# EAGLE board RAMPSdisplay (EAGLE 6.2)
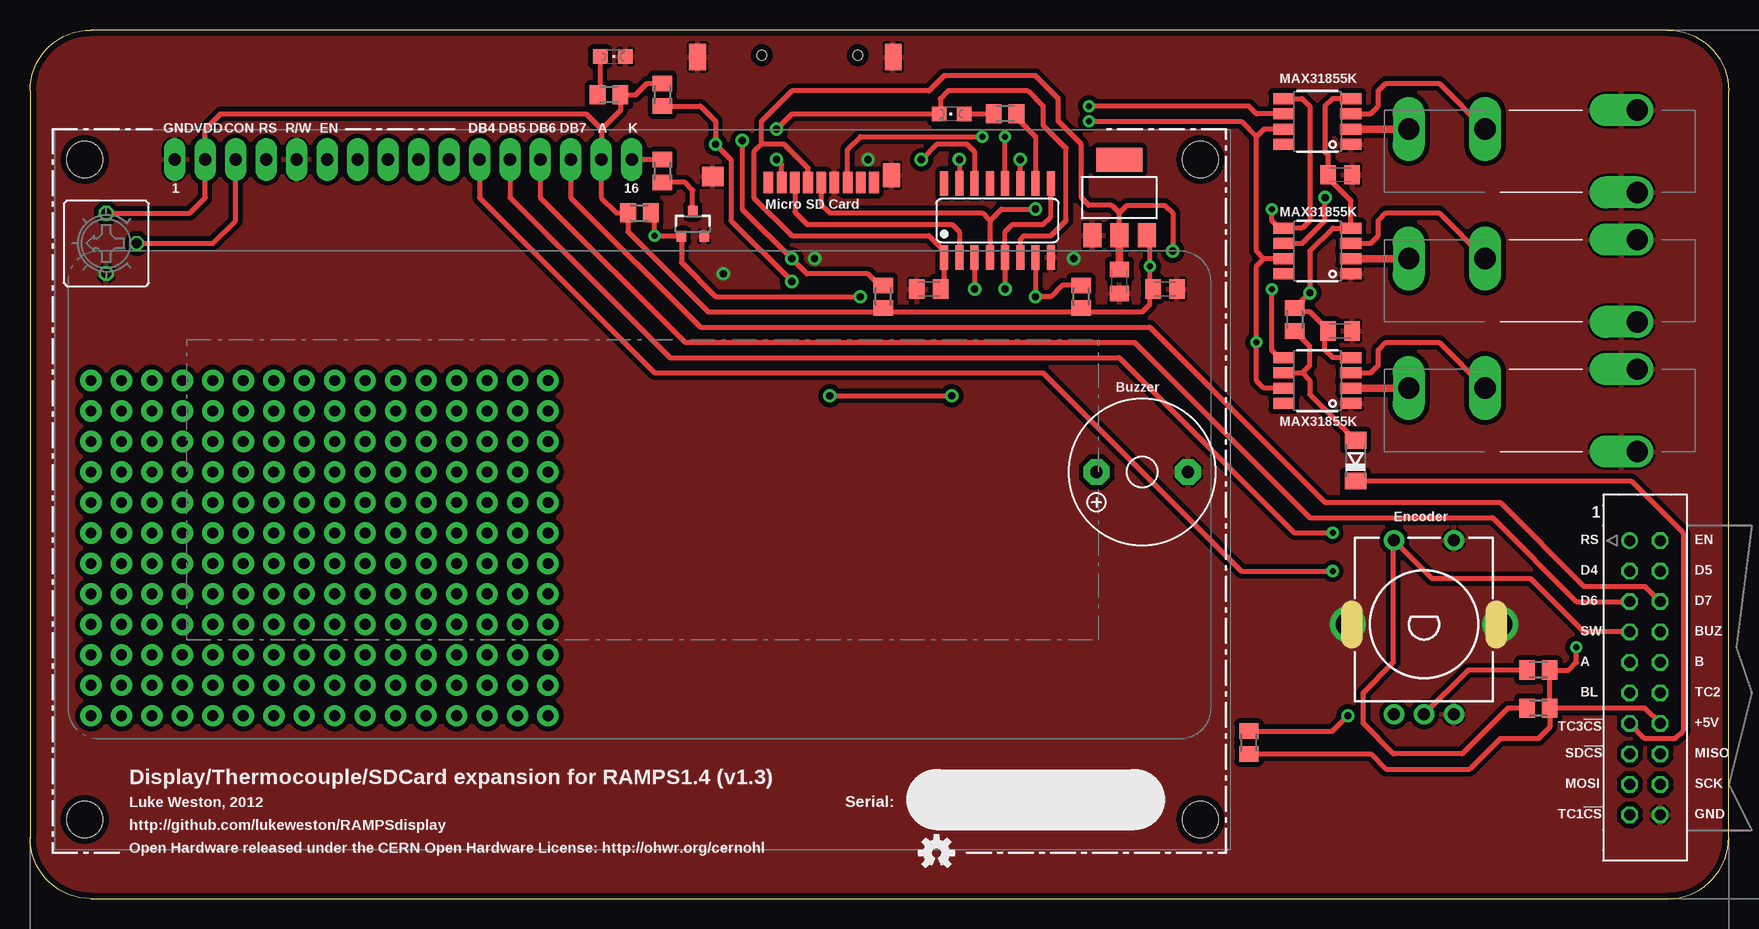
[diagram p0: board, top side]
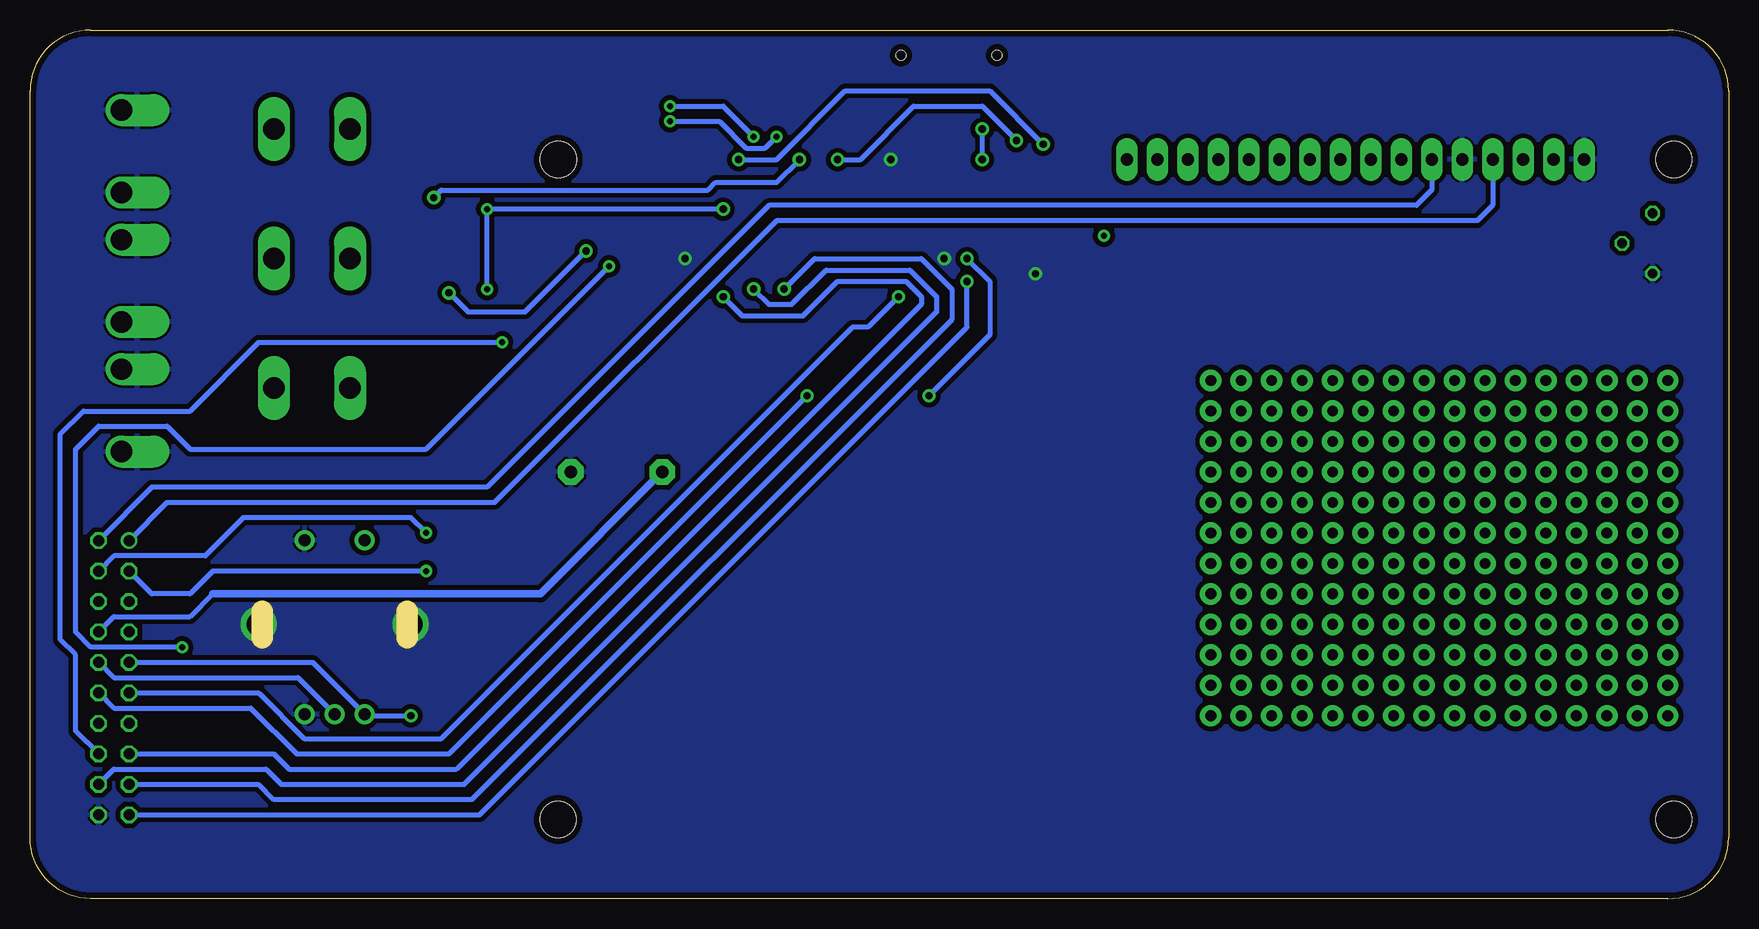
[diagram p1: board, bottom side, seen from below]

Size 141.6 x 72.39 mm. Coordinates in mm from the lower left corner, seen from the top.
Outline: 5.08,0 136.53,0 arc90 141.6,5.08 141.6,67.31 arc90 136.53,72.39 5.08,72.39 arc90 0,67.31 0,5.08 arc90 5.08,0
Copper layers (1*16): Top 0.035mm / dielectric 1.5mm / Bottom 0.035mm
Design rules: minimum track width 8mil, minimum drill 0.4mm, track to track 8mil, track to pad 8mil, pad to pad 8mil, via to via 8mil, smd to smd 8mil, copper to edge 20mil, drill to drill 8mil, minimum pad ring 8mil, minimum via ring 10mil, stop-mask expansion 3mil, vias tented up to drill 0mil, thermal gap 8mil

## Footprints (pad centres in the part's own frame; a part is rotated, then mirrored left to right if it is on the bottom)
C0805K = smd 1.3 x 1.6: 1 -1,0; 2 1,0
SOD80C = smd 1.4 x 1.8: A 1.7,0; C -1.7,0
SOT223 = smd 1.499 x 2.007: 1 -2.261,-3.15; 2 0.025,-3.15; 3 2.311,-3.15 | smd 3.81 x 2.007: 4 0,3.15
SO16 = smd 0.66 x 2.032: 1 -4.445,-3.073; 2 -3.175,-3.073; 3 -1.905,-3.073; 4 -0.635,-3.073; 5 0.635,-3.073; 6 1.905,-3.073; 7 3.175,-3.073; 8 4.445,-3.073; 9 4.445,3.073; 10 3.175,3.073; 11 1.905,3.073; 12 0.635,3.073; 13 -0.635,3.073; 14 -1.905,3.073; 15 -3.175,3.073; 16 -4.445,3.073
MCLENG_SOIC-8 = smd 1.778 x 0.914: CS 2.794,-0.635; GND -2.794,1.905; NC 2.794,1.905; SCK 2.794,-1.905; SO 2.794,0.635; T+ -2.794,-0.635; T- -2.794,0.635; VCC -2.794,-1.905
MCLAUGHLINENG_TC_JACK = drill 1.778 offset: P$1 -5.283,0; P$2 1.575,0 | drill 1.778 long: T+ 0,12.7; T- 0,19.05
MICROSD_PP = smd 1.8 x 0.8: 1 0,3.85; 2 0,2.75; 3 0,1.65; 4 0,0.55; 5 0,-0.55; 6 0,-1.65; 7 0,-2.75; 8 0,-3.85; 9 0,-4.95 | smd 1.6 x 1.8: GND@1 0.5,8.5 | smd 2.2 x 1.4: GND@2 10.45,9.75; GND@4 10.45,-6.55 | smd 2 x 1.4: GND@3 0.6,-6.4 | hole 0.8: 10.6,4.4; 10.6,-3.6
CON20 = drill 0.914: 1 -11.43,-1.27 | drill 0.914 octagon: 2 -11.43,1.27; 3 -8.89,-1.27; 4 -8.89,1.27; 5 -6.35,-1.27; 6 -6.35,1.27; 7 -3.81,-1.27; 8 -3.81,1.27; 9 -1.27,-1.27; 10 -1.27,1.27; 11 1.27,-1.27; 12 1.27,1.27; 13 3.81,-1.27; 14 3.81,1.27; 15 6.35,-1.27; 16 6.35,1.27; 17 8.89,-1.27; 18 8.89,1.27; 19 11.43,-1.27; 20 11.43,1.27
HDM20416L = drill 1.016 pad 1.778 long: 1 -38.105,27.947; 2 -35.565,27.947; 3 -33.025,27.947; 4 -30.485,27.947; 5 -27.945,27.947; 6 -25.405,27.947; 7 -22.865,27.947; 8 -20.325,27.947; 9 -17.785,27.947; 10 -15.245,27.947; 11 -12.705,27.947; 12 -10.165,27.947; 13 -7.625,27.947; 14 -5.085,27.947; 15 -2.545,27.947; 16 -0.005,27.947 | hole 3: -45.593,27.94; -45.593,-27.064; 47.409,-27.064; 47.396,27.94
CHIPLED_0805 = smd 1.2 x 1.2: A 0,-1.05; C 0,1.05
SOT23-3 = smd 0.8 x 0.9: 1 -0.95,-1; 2 0.95,-1; 3 0,1.1
F/TMB = drill 1.016 pad 2.159 octagon: + 3.81,0; - -3.81,0
M0805 = smd 1.3 x 1.6: 1 -0.95,0; 2 0.95,0
CI-11 = drill 1 pad 1.676: A -2.5,-7.5; B 0,-7.5; C 2.5,-7.5; D -2.5,7; E 2.5,7
CT6 = drill 0.813 octagon: A 2.515,0; E -2.515,0; S 0,-2.54

## Placement (x,y rotation side)
C1  100n  [C0805K]  94.61,50.8 0 top
C2  10uF  [C0805K]  90.81,51.44 270 top
C3  100n  [C0805K]  109.22,60.33 0 top
C4  100n  [C0805K]  109.22,47.31 0 top
C5  100 nF  [C0805K]  74.93,50.8 180 top
D1  LL4148  [SOD80C]  110.49,36.51 90 top
IC1  LD1117  [SOT223]  90.81,58.42 0 top
IC2  HEF4050B  [SO16]  80.64,56.52 0 top
IC3  MAX31855K  [MCLENG_SOIC-8]  107.31,64.77 180 top
IC4  MAX31855K  [MCLENG_SOIC-8]  107.31,53.98 180 top
IC5  MAX31855K  [MCLENG_SOIC-8]  107.31,43.18 180 top
J1  PCC-SMP-V-K  [MCLAUGHLINENG_TC_JACK]  133.99,64.14 90 top
J2  PCC-SMP-V-K  [MCLAUGHLINENG_TC_JACK]  133.99,53.34 90 top
J3  Micro-SD socket  [MICROSD_PP]  65.41,59.69 90 top
J4  Interface  [CON20]  134.62,18.41 270 top
J5  PCC-SMP-V-K  [MCLAUGHLINENG_TC_JACK]  133.99,42.55 90 top
LCD1  HD44780 20x4  [HDM20416L]  50.16,33.66 0 top
LED1  Power  [CHIPLED_0805]  48.58,70.17 270 top
LED2  SD act  [CHIPLED_0805]  76.83,65.41 90 top
Q1  2N7002  [SOT23-3]  55.24,56.2 0 top
Q2  Piezo  [F/TMB]  92.71,35.56 180 top
R1  10k  [M0805]  125.73,19.05 0 top
R2  10k  [M0805]  125.73,15.88 0 top
R3  10k  [M0805]  101.6,13.02 270 top
R4  22 R  [M0805]  52.7,60.64 90 top
R5  10k  [M0805]  50.8,57.15 180 top
R6  1k  [M0805]  48.26,66.99 0 top
R7  10 k  [M0805]  81.28,65.41 0 top
R8  10k  [M0805]  71.12,50.16 270 top
R9  10 k  [M0805]  52.7,66.99 90 top
R10  10k  [M0805]  87.63,50.16 270 top
R11  10 k  [M0805]  105.41,48.26 90 top
SW1  CI-11  [CI-11]  116.2,22.86 0 top
U$  OSHW-LOGOS  [OSHW-LOGO-S]  75.56,3.81 0 top
VR1  10 k  [CT6]  6.35,54.61 90 top

## Library data of the parts
C1-C5 R1-R11 = rcl
D1 = diode
IC1 = burr-brown; MPN: REG1117; OC_FARNELL: 1097566; OC_NEWARK: 14P6981
IC2 = 40xx
IC3-IC5 J1 J2 J5 = RAMPSdisplay
J3 = DE1594
J4 = con-harting; OC_FARNELL: unknown; OC_NEWARK: unknown
LCD1 = abi-lcd
LED1 LED2 = led
Q1 = freetronics-master-v1
Q2 = buzzer; OC_FARNELL: unknown; OC_NEWARK: unknown
SW1 = piher; OC_FARNELL: unknown; OC_NEWARK: unknown
U$ = SparkFun
VR1 = pot

## Nets
!SD_CS: IC2.7 J4.15 R10.1
!TC1_CS: IC2.11 J4.19 R9.1
!TC2_CS: IC2.14 J4.12 R8.1
!TC3_CS: D1.C J4.13
+3V3: C2.1 C3.1 C4.1 C5.1 IC1.2 IC2.1 IC3.VCC IC4.VCC IC5.VCC J3.4 R11.2
+5V: C1.1 IC1.3 J4.14 LCD1.2 LCD1.15 R1.2 R2.2 R3.2 R5.2 R6.2 R8.2 R9.2 R10.2 VR1.A
A: J4.9 R3.1 SW1.A
B: J4.10 R1.1 SW1.B
BF: IC2.12 IC3.CS
BLIGHT: J4.11 Q1.1 R5.1
BUZZER: J4.8 Q2.+
D4: J4.3 LCD1.11
D5: J4.4 LCD1.12
D6: J4.5 LCD1.13
D7: J4.6 LCD1.14
EN: J4.2 LCD1.6
FOO: IC2.6 J3.2 LED2.C
GND: C1.2 C2.2 C3.2 C4.2 C5.2 IC1.1 IC2.8 IC3.GND IC4.GND IC5.GND J1.P$1 J1.P$2 J2.P$1 J2.P$2 J3.6 J3.GND@1 J3.GND@2 J3.GND@3 J3.GND@4 J4.20 J5.P$1 J5.P$2 LCD1.1 LCD1.5 LED1.C Q1.2 Q2.- SW1.C SW1.E VR1.E
MISO: IC3.SO IC4.SO IC5.SO J3.7 J4.16
MOSI: IC2.3 J4.17
MOSI_3.3V: IC2.2 J3.3
N$1: LCD1.3 VR1.S
N$2: LCD1.16 R4.2
N$10: IC5.T+ J5.T+
N$13: IC5.T- J5.T-
N$14: Q1.3 R4.1
N$15: IC4.T- J2.T-
N$16: D1.A IC5.CS R11.1
N$17: IC4.T+ J2.T+
N$18: IC3.T- J1.T-
N$19: IC3.T+ J1.T+
N$20: IC2.15 IC4.CS
N$22: LED2.A R7.1
N$25: IC2.10 R7.2
N$75: LED1.A R6.1
RS: J4.1 LCD1.4
SCK: IC2.5 IC2.9 J4.18
SCK_3.3V: IC2.4 IC3.SCK IC4.SCK IC5.SCK J3.5
SW: J4.7 R2.1 SW1.D

## Tracks (layer width: path | path; a pad name or v marks a point on that pad's centre or on a via)
!SD_CS  (via drill 0.6)
  Top 0.406: IC2.7 v83.82,50.16 85.09,50.16 86.04,51.12 R10.1
  Bottom 0.406: J4.15 121.28,12.06 120.02,10.79 106.05,10.79 67.31,49.53 67.31,50.16 68.58,51.44 74.3,51.44 77.15,48.58 82.23,48.58 v83.82,50.16
!TC1_CS  (via drill 0.6)
  Top 0.406: IC2.11 v82.55,61.59 | v63.5,51.44 58.42,56.52 58.42,61.59 v57.15,62.87 57.15,64.77 55.88,66.04 R9.1
  Bottom 0.406: J4.19 104.14,6.99 63.5,47.62 v63.5,51.44 | v82.55,61.59 79.38,61.59 73.66,67.31 61.59,67.31 v57.15,62.87
!TC2_CS  (via drill 0.6)
  Top 0.406: v66.67,41.91 v76.83,41.91 | v74.3,61.59 75.56,62.87 78.11,62.87 78.74,62.23 IC2.14 | v59.37,63.18 59.37,57.47 v63.5,53.34 64.77,52.07 69.85,52.07 70.81,51.12 R8.1
  Bottom 0.406: v63.5,53.34 61.59,51.44 61.59,46.99 v66.67,41.91 | J4.12 134.62,15.88 123.19,15.88 119.38,12.06 106.68,12.06 v76.83,41.91 | v74.3,61.59 72.39,61.59 67.94,66.04 62.23,66.04 v59.37,63.18
!TC3_CS
  Top 0.406: D1.C 133.46,34.81 137.79,30.48 137.79,13.97 137.16,13.34 134.62,13.34 J4.13
+3V3  (via drill 0.6)
  Top 0.406: IC2.1 76.2,50.44 C5.1 | IC1.2 90.81,55.24 90.81,57.15 | IC3.VCC 108.58,66.67 107.95,66.04 107.95,62.23 108.22,61.96 C3.1 108.22,60.05 110.11,58.17 IC4.VCC 108.58,55.88 106.68,53.98 v106.68,50.48 105.73,49.53 105.41,49.53 R11.2 105.72,48.9 106.68,48.9 108.22,47.35 C4.1 107.95,47.04 107.95,45.72 108.58,45.09 IC5.VCC | 76.1,53.34 IC2.1 | 90.53,52.7 C2.1 | 90.81,57.15 91.44,57.78 94.61,57.78 95.25,57.15 v95.25,53.98 | J3.4 64.86,60.88 62.87,62.87 60.96,62.87 | 60.96,62.87 60.33,62.23 60.33,58.42 63.5,55.24 74.93,55.24 76.2,53.98 IC2.1 | 60.96,62.87 60.96,64.77 63.5,67.31 74.93,67.31 76.2,68.58 83.82,68.58 85.72,66.67 85.72,64.77 87.63,62.87 87.63,58.42 88.27,57.78 90.17,57.78 90.81,57.15
  Top 0.61: 90.81,55.24 C2.1
  Bottom 0.406: v106.68,50.48 105.09,48.9 100.33,48.9 v95.25,53.98
+5V  (via drill 0.5)
  Top 0.406: R2.2 R1.2 128.27,19.05 128.91,19.68 v128.91,20.95 | J4.14 134.62,15.88 R2.2 | VR1.A 13.31,57.12 14.61,58.42 LCD1.2 14.6,64.13 15.88,65.41 46.35,65.41 47.62,64.14 | 47.62,64.14 LCD1.15 47.62,58.42 48.9,57.15 R5.2 49.85,55.56 56.52,48.9 71.12,48.9 | 71.12,48.9 87.63,48.9 | 87.63,48.9 92.71,48.9 93.34,49.53 93.34,50.53 | 93.34,50.53 v93.34,52.7 93.34,55.04 IC1.3 | 93.34,50.53 C1.1 | R10.2 87.63,48.9 | R8.2 71.12,48.9 | 47.62,64.14 49.21,65.72 R6.2 50.48,66.99 51.44,67.94 R9.2 | R2.2 126.68,14.29 125.73,13.34 122.56,13.34 120.02,10.79 113.03,10.79 111.76,12.07 R3.2
  Bottom 0.406: v128.91,20.95 136.53,20.95 137.79,22.23 137.79,37.47 135.89,39.37 130.18,39.37 128.27,37.47 108.58,37.47 v93.34,52.7
A  (via drill 0.6)
  Top 0.406: R3.1 108.58,13.97 v109.86,15.24
  Bottom 0.406: J4.9 118.03,19.68 SW1.A 113.15,15.36 113.03,15.24 v109.86,15.24
B
  Top 0.406: R1.1 119.89,19.05 SW1.B
  Bottom 0.406: J4.10 134.62,18.41 119.26,18.41 SW1.B
BF  (via drill 0.5)
  Top 0.406: IC2.12 v81.28,63.5 | IC3.CS 102.23,65.41 101.6,66.04 v88.27,66.04
  Bottom 0.406: v81.28,63.5 83.82,66.04 v88.27,66.04
BLIGHT  (via drill 0.5, 0.6)
  Top 0.406: R5.1 52.07,56.83 v52.07,55.24 52.12,55.2 Q1.1 54.3,53.02 57.15,50.16 v69.22,50.16
  Bottom 0.406: J4.11 122.56,17.14 118.75,13.34 107.31,13.34 73.03,47.62 71.75,47.62 v69.22,50.16
BUZZER
  Bottom 0.406: J4.8 134.62,23.5 128.27,23.5 126.36,25.4
  Bottom 0.61: 126.36,25.4 99.06,25.4 Q2.+
D4  (via drill 0.5)
  Top 0.406: LCD1.11 37.46,58.42 52.07,43.81 84.45,43.81 100.97,27.3 v108.58,27.3
  Bottom 0.406: v108.58,27.3 126.36,27.3 128.27,25.4 131.44,25.4 J4.3
D5  (via drill 0.5)
  Top 0.406: LCD1.12 40,58.42 53.34,45.09 90.81,45.09 105.41,30.48 v108.58,30.48
  Bottom 0.406: v108.58,30.48 109.86,31.75 123.83,31.75 127,28.57 134.62,28.57 J4.4
D6
  Top 0.406: LCD1.13 42.54,58.42 54.61,46.35 92.08,46.35 106.68,31.75 121.92,31.75 128.91,24.77 J4.5
D7
  Top 0.406: LCD1.14 45.08,58.42 55.88,47.62 93.34,47.62 107.95,33.02 122.56,33.02 129.54,26.04 134.62,26.04 J4.6
EN
  Bottom 0.406: LCD1.6 24.76,59.06 26.04,57.78 80.01,57.78 103.5,34.29 131.44,34.29 J4.2
FOO  (via drill 0.6)
  Top 0.406: J3.2 62.66,61.17 v62.23,61.59 | v62.23,64.14 63.5,65.41 LED2.C 75.88,65.5 75.88,66.67 76.52,67.31 83.19,67.31 84.45,66.04 84.45,64.45 86.36,62.55 86.36,56.52 85.09,55.24 82.87,55.24 82.55,54.93 IC2.6
  Bottom 0.406: v62.23,61.59 v62.23,64.14
GND  (via drill 0.6, 2)
  other vias: 65.41,53.34 69.85,61.59 57.78,52.07 87,53.34 109.86,22.86 122.56,22.86
  pour Bottom (isolate 0.406): -0.64,74.3 142.88,74.3 142.88,-1.27 -0.64,-1.27
  pour Top (isolate 0.406): -0.64,74.3 142.88,74.3 142.88,-1.27 -0.64,-1.27
MISO  (via drill 0.5)
  Top 0.406: J3.7 68.16,62.44 69.22,63.5 v79.38,63.5 | IC3.SO 102.87,64.14 102.23,63.5 | 102.87,53.34 102.23,52.7 v102.23,46.35 102.23,43.18 102.87,42.55 IC5.SO 104.78,42.55 | 104.78,53.34 IC4.SO 102.87,53.34 | 102.87,53.34 102.23,53.98 102.23,63.5 | v88.27,64.77 100.97,64.77 102.23,63.5
  Bottom 0.406: v79.38,63.5 80.33,62.55 81.92,62.55 84.14,64.77 v88.27,64.77 | J4.16 137.79,13.97 137.79,20.32 139.06,21.59 139.06,38.73 137.16,40.64 128.27,40.64 122.56,46.35 v102.23,46.35
MOSI  (via drill 0.6)
  Top 0.406: IC2.3 v78.74,50.8
  Bottom 0.406: J4.17 122.56,9.53 121.28,8.26 104.78,8.26 64.77,48.26 64.77,50.8 67.31,53.34 76.2,53.34 v78.74,50.8
MOSI_3.3V
  Top 0.406: J3.3 63.76,57.21 64.77,56.2 76.83,56.2 77.47,55.56 IC2.2
N$1
  Top 0.406: VR1.S 15.24,54.61 17.14,56.52 LCD1.3
N$2
  Top 0.406: LCD1.16 52.7,61.6 R4.2
N$10
  Top 0.406: IC5.T+ 111.76,43.81 112.39,44.45 112.39,45.72 113.03,46.35 117.47,46.35 J5.T+
N$13
  Top 0.61: IC5.T- J5.T-
N$14
  Top 0.406: Q1.3 55.24,59.05 54.61,59.69 R4.1
N$15
  Top 0.61: IC4.T- J2.T-
N$16
  Top 0.406: IC5.CS 106.05,43.81 | 106.05,43.81 106.68,44.45 106.68,46.04 R11.1 | 106.05,43.81 106.68,43.18 106.68,42.02 D1.A
N$17
  Top 0.406: IC4.T+ 111.76,54.61 112.39,55.24 112.39,56.52 113.03,57.15 117.47,57.15 J2.T+
N$18
  Top 0.61: IC3.T- J1.T-
N$19
  Top 0.406: IC3.T+ 111.76,65.41 112.39,66.04 112.39,67.31 113.03,67.94 117.47,67.94 J1.T+
N$20  (via drill 0.6)
  Top 0.406: IC4.CS 106.05,54.61 107.95,56.52 v107.95,58.42 | v77.47,61.59 IC2.15
  Bottom 0.406: v107.95,58.42 107.31,59.05 85.09,59.05 84.45,59.69 79.38,59.69 v77.47,61.59
N$21  (via drill 0.9 pad 1.78)
  other vias: 5.08,38.1
N$22
  Top 0.406: LED2.A R7.1
N$23  (via drill 0.9 pad 1.78)
  other vias: 5.08,40.64
N$24  (via drill 0.9 pad 1.78)
  other vias: 7.62,40.64
N$25
  Top 0.406: R7.2 81.92,65.41 83.82,63.5 IC2.10
N$26  (via drill 0.9 pad 1.78)
  other vias: 10.16,40.64
N$27  (via drill 0.9 pad 1.78)
  other vias: 10.16,38.1
N$28  (via drill 0.9 pad 1.78)
  other vias: 5.08,15.24
N$29  (via drill 0.9 pad 1.78)
  other vias: 5.08,17.78
N$32  (via drill 0.9 pad 1.78)
  other vias: 5.08,20.32
N$33  (via drill 0.9 pad 1.78)
  other vias: 5.08,22.86
N$35  (via drill 0.9 pad 1.78)
  other vias: 5.08,25.4
N$41  (via drill 0.9 pad 1.78)
  other vias: 5.08,35.56
N$42  (via drill 0.9 pad 1.78)
  other vias: 5.08,33.02
N$43  (via drill 0.9 pad 1.78)
  other vias: 5.08,30.48
N$44  (via drill 0.9 pad 1.78)
  other vias: 5.08,27.94
N$75
  Top 0.406: LED1.A 47.53,67.21 R6.1
N$81  (via drill 0.9 pad 1.78)
  other vias: 20.32,40.64
N$82  (via drill 0.9 pad 1.78)
  other vias: 17.78,38.1
N$83  (via drill 0.9 pad 1.78)
  other vias: 12.7,40.64
N$84  (via drill 0.9 pad 1.78)
  other vias: 15.24,38.1
N$85  (via drill 0.9 pad 1.78)
  other vias: 22.86,38.1
N$86  (via drill 0.9 pad 1.78)
  other vias: 25.4,40.64
N$87  (via drill 0.9 pad 1.78)
  other vias: 25.4,38.1
N$88  (via drill 0.9 pad 1.78)
  other vias: 20.32,38.1
N$89  (via drill 0.9 pad 1.78)
  other vias: 22.86,40.64
N$90  (via drill 0.9 pad 1.78)
  other vias: 17.78,40.64
N$91  (via drill 0.9 pad 1.78)
  other vias: 7.62,38.1
N$92  (via drill 0.9 pad 1.78)
  other vias: 15.24,40.64
N$93  (via drill 0.9 pad 1.78)
  other vias: 27.94,38.1
N$184  (via drill 0.9 pad 1.78)
  other vias: 27.94,40.64
N$185  (via drill 0.9 pad 1.78)
  other vias: 35.56,38.1
N$217  (via drill 0.9 pad 1.78)
  other vias: 7.62,35.56
N$218  (via drill 0.9 pad 1.78)
  other vias: 7.62,33.02
N$219  (via drill 0.9 pad 1.78)
  other vias: 7.62,30.48
N$229  (via drill 0.9 pad 1.78)
  other vias: 33.02,38.1
N$230  (via drill 0.9 pad 1.78)
  other vias: 38.1,38.1
N$231  (via drill 0.9 pad 1.78)
  other vias: 22.86,43.18
N$232  (via drill 0.9 pad 1.78)
  other vias: 5.08,43.18
N$233  (via drill 0.9 pad 1.78)
  other vias: 25.4,43.18
N$234  (via drill 0.9 pad 1.78)
  other vias: 40.64,38.1
N$284  (via drill 0.9 pad 1.78)
  other vias: 43.18,40.64
N$285  (via drill 0.9 pad 1.78)
  other vias: 43.18,38.1
N$286  (via drill 0.9 pad 1.78)
  other vias: 43.18,43.18
N$287  (via drill 0.9 pad 1.78)
  other vias: 40.64,43.18
N$288  (via drill 0.9 pad 1.78)
  other vias: 38.1,43.18
N$289  (via drill 0.9 pad 1.78)
  other vias: 35.56,43.18
N$290  (via drill 0.9 pad 1.78)
  other vias: 33.02,43.18
N$292  (via drill 0.9 pad 1.78)
  other vias: 30.48,43.18
N$293  (via drill 0.9 pad 1.78)
  other vias: 27.94,43.18
N$294  (via drill 0.9 pad 1.78)
  other vias: 12.7,38.1
N$295  (via drill 0.9 pad 1.78)
  other vias: 33.02,40.64
N$296  (via drill 0.9 pad 1.78)
  other vias: 30.48,40.64
N$297  (via drill 0.9 pad 1.78)
  other vias: 30.48,38.1
N$298  (via drill 0.9 pad 1.78)
  other vias: 35.56,40.64
N$299  (via drill 0.9 pad 1.78)
  other vias: 10.16,43.18
N$300  (via drill 0.9 pad 1.78)
  other vias: 40.64,40.64
N$301  (via drill 0.9 pad 1.78)
  other vias: 38.1,40.64
N$302  (via drill 0.9 pad 1.78)
  other vias: 7.62,27.94
N$303  (via drill 0.9 pad 1.78)
  other vias: 7.62,25.4
N$304  (via drill 0.9 pad 1.78)
  other vias: 7.62,22.86
N$305  (via drill 0.9 pad 1.78)
  other vias: 7.62,20.32
N$306  (via drill 0.9 pad 1.78)
  other vias: 7.62,17.78
N$307  (via drill 0.9 pad 1.78)
  other vias: 7.62,15.24
N$308  (via drill 0.9 pad 1.78)
  other vias: 10.16,15.24
N$309  (via drill 0.9 pad 1.78)
  other vias: 15.24,15.24
N$310  (via drill 0.9 pad 1.78)
  other vias: 12.7,15.24
N$311  (via drill 0.9 pad 1.78)
  other vias: 17.78,15.24
N$312  (via drill 0.9 pad 1.78)
  other vias: 22.86,15.24
N$313  (via drill 0.9 pad 1.78)
  other vias: 20.32,15.24
N$314  (via drill 0.9 pad 1.78)
  other vias: 25.4,15.24
N$315  (via drill 0.9 pad 1.78)
  other vias: 27.94,15.24
N$316  (via drill 0.9 pad 1.78)
  other vias: 30.48,15.24
N$317  (via drill 0.9 pad 1.78)
  other vias: 35.56,15.24
N$318  (via drill 0.9 pad 1.78)
  other vias: 33.02,15.24
N$319  (via drill 0.9 pad 1.78)
  other vias: 40.64,15.24
N$320  (via drill 0.9 pad 1.78)
  other vias: 38.1,15.24
N$321  (via drill 0.9 pad 1.78)
  other vias: 43.18,15.24
N$350  (via drill 0.9 pad 1.78)
  other vias: 12.7,35.56
N$358  (via drill 0.9 pad 1.78)
  other vias: 15.24,35.56
N$359  (via drill 0.9 pad 1.78)
  other vias: 17.78,35.56
N$360  (via drill 0.9 pad 1.78)
  other vias: 10.16,35.56
N$361  (via drill 0.9 pad 1.78)
  other vias: 10.16,33.02
N$362  (via drill 0.9 pad 1.78)
  other vias: 10.16,30.48
N$363  (via drill 0.9 pad 1.78)
  other vias: 10.16,27.94
N$364  (via drill 0.9 pad 1.78)
  other vias: 10.16,25.4
N$365  (via drill 0.9 pad 1.78)
  other vias: 10.16,22.86
N$366  (via drill 0.9 pad 1.78)
  other vias: 10.16,20.32
N$367  (via drill 0.9 pad 1.78)
  other vias: 10.16,17.78
N$368  (via drill 0.9 pad 1.78)
  other vias: 12.7,17.78
N$369  (via drill 0.9 pad 1.78)
  other vias: 12.7,20.32
N$370  (via drill 0.9 pad 1.78)
  other vias: 12.7,22.86
N$371  (via drill 0.9 pad 1.78)
  other vias: 12.7,25.4
N$372  (via drill 0.9 pad 1.78)
  other vias: 15.24,30.48
N$373  (via drill 0.9 pad 1.78)
  other vias: 12.7,27.94
N$374  (via drill 0.9 pad 1.78)
  other vias: 12.7,30.48
N$375  (via drill 0.9 pad 1.78)
  other vias: 12.7,33.02
N$376  (via drill 0.9 pad 1.78)
  other vias: 15.24,33.02
N$377  (via drill 0.9 pad 1.78)
  other vias: 17.78,33.02
N$378  (via drill 0.9 pad 1.78)
  other vias: 17.78,30.48
N$379  (via drill 0.9 pad 1.78)
  other vias: 17.78,27.94
N$380  (via drill 0.9 pad 1.78)
  other vias: 17.78,25.4
N$381  (via drill 0.9 pad 1.78)
  other vias: 17.78,22.86
N$382  (via drill 0.9 pad 1.78)
  other vias: 17.78,20.32
N$383  (via drill 0.9 pad 1.78)
  other vias: 17.78,17.78
N$384  (via drill 0.9 pad 1.78)
  other vias: 15.24,17.78
N$385  (via drill 0.9 pad 1.78)
  other vias: 15.24,20.32
N$386  (via drill 0.9 pad 1.78)
  other vias: 15.24,22.86
N$387  (via drill 0.9 pad 1.78)
  other vias: 15.24,25.4
N$388  (via drill 0.9 pad 1.78)
  other vias: 15.24,27.94
N$390  (via drill 0.9 pad 1.78)
  other vias: 20.32,35.56
N$391  (via drill 0.9 pad 1.78)
  other vias: 20.32,33.02
N$392  (via drill 0.9 pad 1.78)
  other vias: 20.32,30.48
N$393  (via drill 0.9 pad 1.78)
  other vias: 20.32,25.4
N$394  (via drill 0.9 pad 1.78)
  other vias: 20.32,27.94
N$395  (via drill 0.9 pad 1.78)
  other vias: 20.32,20.32
N$396  (via drill 0.9 pad 1.78)
  other vias: 20.32,17.78
N$397  (via drill 0.9 pad 1.78)
  other vias: 20.32,22.86
N$398  (via drill 0.9 pad 1.78)
  other vias: 22.86,17.78
N$399  (via drill 0.9 pad 1.78)
  other vias: 25.4,17.78
N$400  (via drill 0.9 pad 1.78)
  other vias: 27.94,17.78
N$401  (via drill 0.9 pad 1.78)
  other vias: 30.48,17.78
N$402  (via drill 0.9 pad 1.78)
  other vias: 33.02,17.78
N$403  (via drill 0.9 pad 1.78)
  other vias: 35.56,17.78
N$404  (via drill 0.9 pad 1.78)
  other vias: 38.1,17.78
N$405  (via drill 0.9 pad 1.78)
  other vias: 40.64,17.78
N$406  (via drill 0.9 pad 1.78)
  other vias: 43.18,17.78
N$410  (via drill 0.9 pad 1.78)
  other vias: 7.62,43.18
N$411  (via drill 0.9 pad 1.78)
  other vias: 15.24,43.18
N$412  (via drill 0.9 pad 1.78)
  other vias: 12.7,43.18
N$413  (via drill 0.9 pad 1.78)
  other vias: 17.78,43.18
N$414  (via drill 0.9 pad 1.78)
  other vias: 20.32,43.18
N$417  (via drill 0.9 pad 1.78)
  other vias: 43.18,35.56
N$418  (via drill 0.9 pad 1.78)
  other vias: 43.18,33.02
N$419  (via drill 0.9 pad 1.78)
  other vias: 43.18,30.48
N$420  (via drill 0.9 pad 1.78)
  other vias: 43.18,27.94
N$421  (via drill 0.9 pad 1.78)
  other vias: 43.18,25.4
N$422  (via drill 0.9 pad 1.78)
  other vias: 43.18,22.86
N$423  (via drill 0.9 pad 1.78)
  other vias: 43.18,20.32
N$424  (via drill 0.9 pad 1.78)
  other vias: 22.86,20.32
N$425  (via drill 0.9 pad 1.78)
  other vias: 25.4,20.32
N$426  (via drill 0.9 pad 1.78)
  other vias: 27.94,20.32
N$427  (via drill 0.9 pad 1.78)
  other vias: 30.48,20.32
N$428  (via drill 0.9 pad 1.78)
  other vias: 33.02,20.32
N$429  (via drill 0.9 pad 1.78)
  other vias: 35.56,20.32
N$430  (via drill 0.9 pad 1.78)
  other vias: 38.1,20.32
N$431  (via drill 0.9 pad 1.78)
  other vias: 40.64,20.32
N$432  (via drill 0.9 pad 1.78)
  other vias: 40.64,22.86
N$433  (via drill 0.9 pad 1.78)
  other vias: 38.1,22.86
N$434  (via drill 0.9 pad 1.78)
  other vias: 35.56,22.86
N$435  (via drill 0.9 pad 1.78)
  other vias: 30.48,22.86
N$436  (via drill 0.9 pad 1.78)
  other vias: 33.02,22.86
N$437  (via drill 0.9 pad 1.78)
  other vias: 27.94,22.86
N$438  (via drill 0.9 pad 1.78)
  other vias: 25.4,22.86
N$439  (via drill 0.9 pad 1.78)
  other vias: 22.86,22.86
N$440  (via drill 0.9 pad 1.78)
  other vias: 22.86,25.4
N$441  (via drill 0.9 pad 1.78)
  other vias: 22.86,27.94
N$442  (via drill 0.9 pad 1.78)
  other vias: 22.86,30.48
N$443  (via drill 0.9 pad 1.78)
  other vias: 22.86,33.02
N$444  (via drill 0.9 pad 1.78)
  other vias: 22.86,35.56
N$447  (via drill 0.9 pad 1.78)
  other vias: 25.4,35.56
N$448  (via drill 0.9 pad 1.78)
  other vias: 25.4,33.02
N$449  (via drill 0.9 pad 1.78)
  other vias: 25.4,30.48
N$450  (via drill 0.9 pad 1.78)
  other vias: 25.4,27.94
N$451  (via drill 0.9 pad 1.78)
  other vias: 25.4,25.4
N$452  (via drill 0.9 pad 1.78)
  other vias: 27.94,25.4
N$453  (via drill 0.9 pad 1.78)
  other vias: 30.48,25.4
N$454  (via drill 0.9 pad 1.78)
  other vias: 33.02,25.4
N$455  (via drill 0.9 pad 1.78)
  other vias: 35.56,25.4
N$456  (via drill 0.9 pad 1.78)
  other vias: 38.1,25.4
N$457  (via drill 0.9 pad 1.78)
  other vias: 40.64,25.4
N$458  (via drill 0.9 pad 1.78)
  other vias: 40.64,27.94
N$459  (via drill 0.9 pad 1.78)
  other vias: 40.64,30.48
N$460  (via drill 0.9 pad 1.78)
  other vias: 40.64,33.02
N$461  (via drill 0.9 pad 1.78)
  other vias: 40.64,35.56
N$468  (via drill 0.9 pad 1.78)
  other vias: 27.94,35.56
N$469  (via drill 0.9 pad 1.78)
  other vias: 27.94,33.02
N$470  (via drill 0.9 pad 1.78)
  other vias: 27.94,30.48
N$471  (via drill 0.9 pad 1.78)
  other vias: 27.94,27.94
N$472  (via drill 0.9 pad 1.78)
  other vias: 33.02,27.94
N$473  (via drill 0.9 pad 1.78)
  other vias: 30.48,27.94
N$474  (via drill 0.9 pad 1.78)
  other vias: 30.48,30.48
N$475  (via drill 0.9 pad 1.78)
  other vias: 30.48,33.02
N$476  (via drill 0.9 pad 1.78)
  other vias: 30.48,35.56
N$477  (via drill 0.9 pad 1.78)
  other vias: 33.02,35.56
N$478  (via drill 0.9 pad 1.78)
  other vias: 33.02,33.02
N$479  (via drill 0.9 pad 1.78)
  other vias: 33.02,30.48
N$480  (via drill 0.9 pad 1.78)
  other vias: 35.56,27.94
N$481  (via drill 0.9 pad 1.78)
  other vias: 38.1,27.94
N$482  (via drill 0.9 pad 1.78)
  other vias: 38.1,30.48
N$483  (via drill 0.9 pad 1.78)
  other vias: 38.1,33.02
N$484  (via drill 0.9 pad 1.78)
  other vias: 38.1,35.56
N$485  (via drill 0.9 pad 1.78)
  other vias: 35.56,35.56
N$486  (via drill 0.9 pad 1.78)
  other vias: 35.56,33.02
N$487  (via drill 0.9 pad 1.78)
  other vias: 35.56,30.48
RS
  Bottom 0.406: J4.1 130.18,33.02 102.87,33.02 79.38,56.52 20.95,56.52 19.68,57.79 LCD1.4
SCK  (via drill 0.6)
  Top 0.406: IC2.9 85.09,56.83 84.45,56.2 81.92,56.2 81.28,55.56 IC2.5 v81.28,50.8
  Bottom 0.406: J4.18 134.62,10.79 121.92,10.79 120.65,9.53 105.41,9.53 66.04,48.9 66.04,50.16 68.26,52.39 75.25,52.39 78.11,49.53 80.01,49.53 v81.28,50.8
SCK_3.3V  (via drill 0.5, 0.6)
  Top 0.406: IC3.SCK 106.05,66.67 106.68,66.04 106.68,56.52 106.05,55.88 IC4.SCK 104.14,55.88 103.5,56.52 v103.5,57.47 | J3.5 65.95,57.87 66.67,57.15 79.38,57.15 80.01,56.52 | 80.01,56.52 IC2.4 | IC5.SCK 104.14,45.09 103.5,45.72 v103.5,50.8 | 80.01,56.52 80.96,57.47 v83.82,57.47
  Bottom 0.406: v103.5,50.8 v103.5,57.47 v83.82,57.47
SW
  Top 0.406: R2.1 123.19,15.88 119.38,12.06 113.67,12.06 111.12,14.61 111.12,17.14 113.67,19.68 113.67,29.82 SW1.D 116.89,26.67 125.09,26.67 129.54,22.23 J4.7

## Text on the board
tPlace: GND | VDD | CON | RS | R/W | EN | DB4 | DB4 | DB5 | DB6 | DB7 | A | K | Micro SD Card | Buzzer | 1 | Encoder | RS | EN | D4 | D5 | D6 | D7 | SW | BUZ | A | B | BL | TC2 | TC3!CS! | +5V | SD!CS! | MISO | Display/Thermocouple/SDCard expansion for RAMPS1.4 (v1.3) | MOSI | SCK | Luke Weston, 2012 | Serial: | TC1!CS! | GND | http://github.com/lukeweston/RAMPSdisplay | Open Hardware released under the CERN Open Hardware License: http://ohwr.org/cernohl
tValues: 10k